# EAGLE board Super Turing-Fyyran (EAGLE 9.7.0)

Size 630.52 x 136.42 mm. Coordinates in mm from the lower left corner, seen from the top.
Outline: 0,0 630.52,0 630.52,136.41 0,136.41 0,0
Copper layers (1*16): Top 0.035mm / dielectric 1.5mm / Bottom 0.035mm
Design rules "default": minimum track width 6mil, minimum drill 0.35mm, track to track 6mil, track to pad 6mil, pad to pad 6mil, via to via 6mil, smd to smd 6mil, copper to edge 40mil, drill to drill 6mil, minimum pad ring 10mil, minimum via ring 8mil, stop-mask expansion 4mil, vias tented up to drill 0mil, thermal gap 10mil

## Footprints (pad centres in the part's own frame; a part is rotated, then mirrored left to right if it is on the bottom)
LEDRD254W60D565H860B = drill 0.981 pad 1.581: 1 -1.27,0; 2 1.27,0
DIODE-AXIAL = drill 1: 1 -5.08,0; 2 5.08,0
HC-SR04 = drill 1.016 long: 1 -3.81,0; 2 -1.27,0; 3 1.27,0; 4 3.81,0
MOTOR = drill 1.118 pad 3.15 octagon: + 2.54,0; - -2.54,0
28027 = drill 1.016 long: 1 -2.54,0; 2 0,0; 3 2.54,0
RESAD1016W63L850D250B = drill 0.83 pad 1.43: 1 -5.08,0; 2 5.08,0
TO92 = drill 0.813 octagon: 1 -1.27,0; 2 0,1.905; 3 1.27,0
ARDUINO-UNO-R3-SHIELD = drill 1.016 pad 1.88: 3.3V 24.13,-2.54; 5V 24.13,0; A0 24.13,12.7; A1 24.13,15.24; A2 24.13,17.78; A3 24.13,20.32; A4 24.13,22.86; A5 24.13,25.4; AREF -24.13,-13.97; D2 -24.13,20.32; D3 -24.13,17.78; D4 -24.13,15.24; D5 -24.13,12.7; D6 -24.13,10.16; D7 -24.13,7.62; D8 -24.13,3.81; D9 -24.13,1.27; D10 -24.13,-1.27; D11 -24.13,-3.81; D12 -24.13,-6.35; D13 -24.13,-8.89; GND@0 24.13,2.54; GND@1 24.13,5.08; GND@2 -24.13,-11.43; IOREF 24.13,-7.62; NC 24.13,-10.16; RES 24.13,-5.08; RX -24.13,25.4; SCL -24.13,-19.05; SDA -24.13,-16.51; TX -24.13,22.86; VIN 24.13,7.62

## Placement (x,y rotation side)
D1  RED  [LEDRD254W60D565H860B]  542.4,8.05 180 top
D2  DIODEDIODE-AXIAL  [DIODE-AXIAL]  9.01,68.82 0 top
DIST1  DISTANCE-SENSOR-4PINHC-SR04  [HC-SR04]  53.73,128.8 0 top
M1  MOTOR_HDR  [MOTOR]  16.93,83.2 0 top
PIR1  PIR-SENSOR_28027  [28027]  495.59,64.12 0 top
R1  1k  [RESAD1016W63L850D250B]  548.75,13.13 0 top
R2  1k  [RESAD1016W63L850D250B]  27.09,55.26 0 top
T1  NPN  [TO92]  22.01,60.34 0 top
U1  ARDUINO-UNO-R3-SHIELD  [ARDUINO-UNO-R3-SHIELD]  596.01,78.05 270 top
U2  ARDUINO-UNO-R3-SHIELD  [ARDUINO-UNO-R3-SHIELD]  166.37,87.76 270 top

## Library data of the parts
D1 = Tinkercad; CATEGORY: Opto-Electronic; SUB-CATEGORY: LED; VALUE: LED_RED
D2 DIST1 M1 PIR1 R1 R2 U1 U2 = Tinkercad
T1 = Tinkercad; CATEGORY: Transistor; SUB-CATEGORY: BJT; TYPE: NPN

## Nets
D1_A: D1.1 R1.1
M1_+: D2.2 M1.+ T1.1
T1_B: R2.1 T1.2
U1_5V: PIR1.2 U1.5V
U1_D2: PIR1.1 U1.D2
U1_D13: R1.2 U1.D13
U1_GND: D1.2 PIR1.3 U1.GND@0 U1.GND@1 U1.GND@2
U2_5V: DIST1.1 U2.5V
U2_D3: R2.2 U2.D3
U2_D8: DIST1.3 U2.D8
U2_D9: DIST1.2 U2.D9
U2_GND: D2.1 DIST1.4 M1.- T1.3 U2.GND@0 U2.GND@1 U2.GND@2

## Tracks (layer width: path | path; a pad name or v marks a point on that pad's centre or on a via)
D1_A  (1 unrouted)
M1_+  (2 unrouted)
T1_B  (1 unrouted)
U1_5V  (1 unrouted)
U1_D2  (1 unrouted)
U1_D13  (1 unrouted)
U1_GND  (4 unrouted)
U2_5V  (1 unrouted)
U2_D3  (1 unrouted)
U2_D8  (1 unrouted)
U2_D9  (1 unrouted)
U2_GND  (6 unrouted)